# EAGLE board panel-controllers (EAGLE 9.6.2)
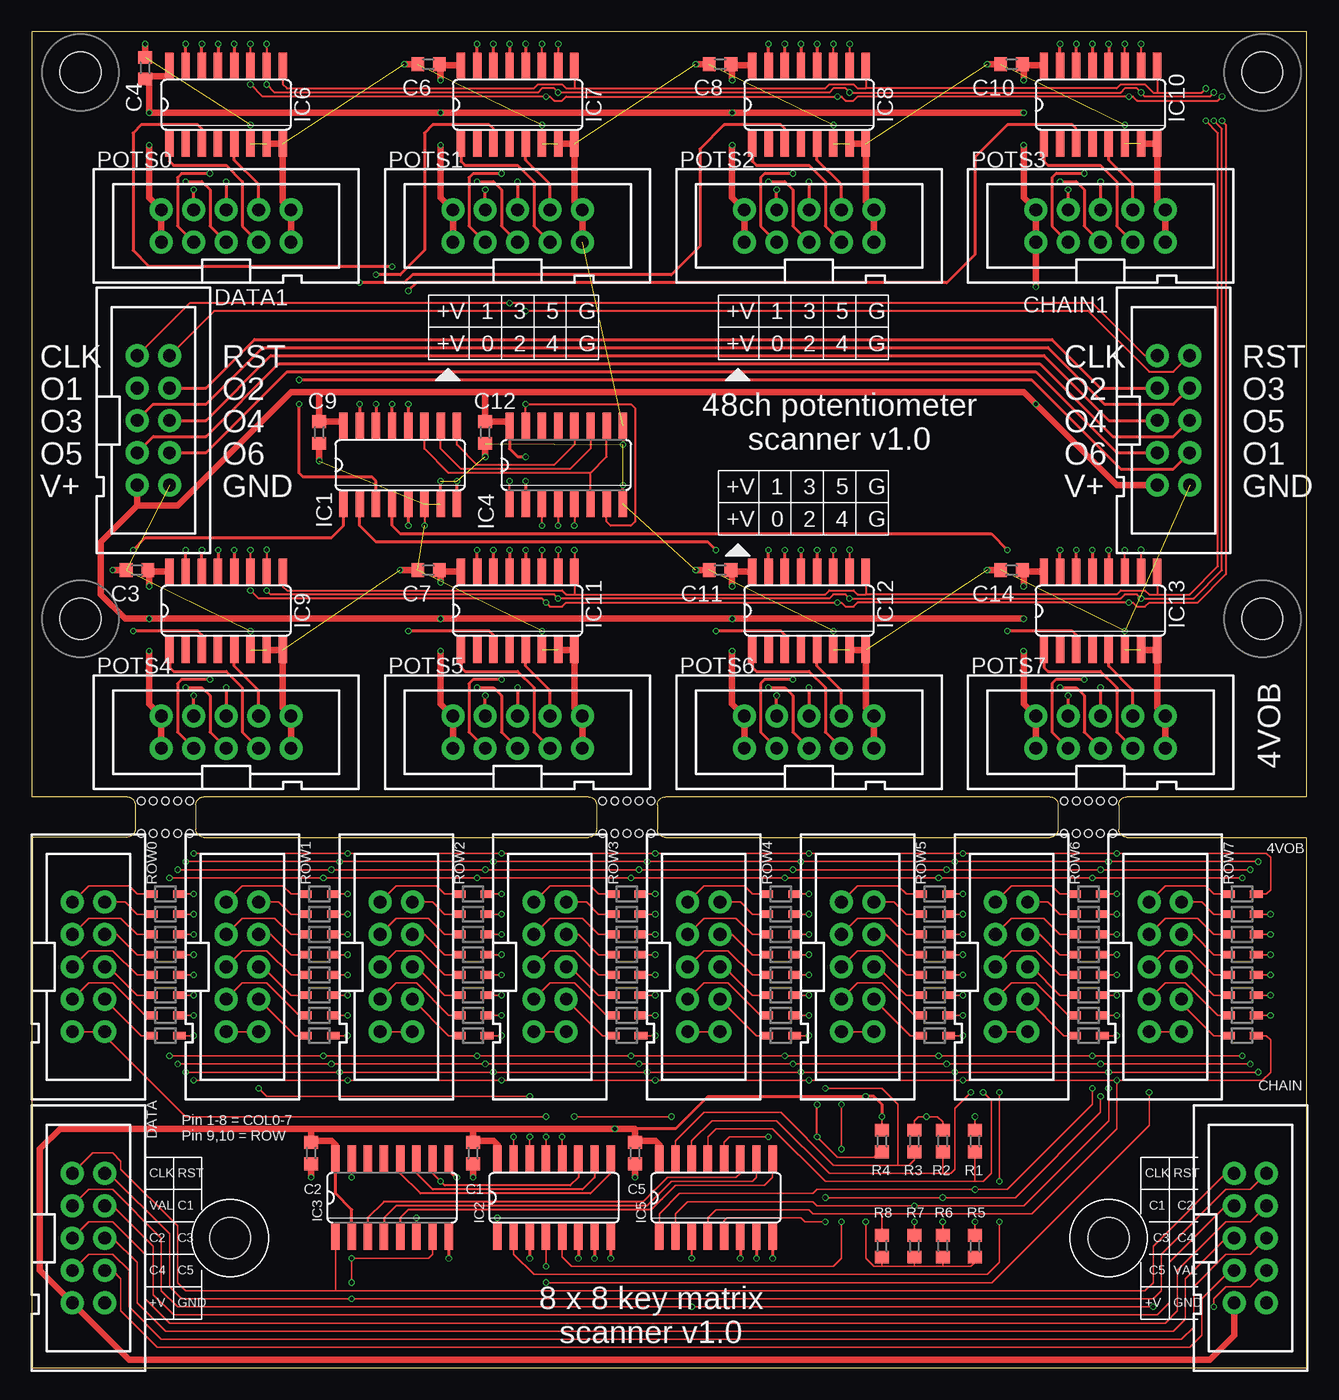
[diagram p0: board, top side]
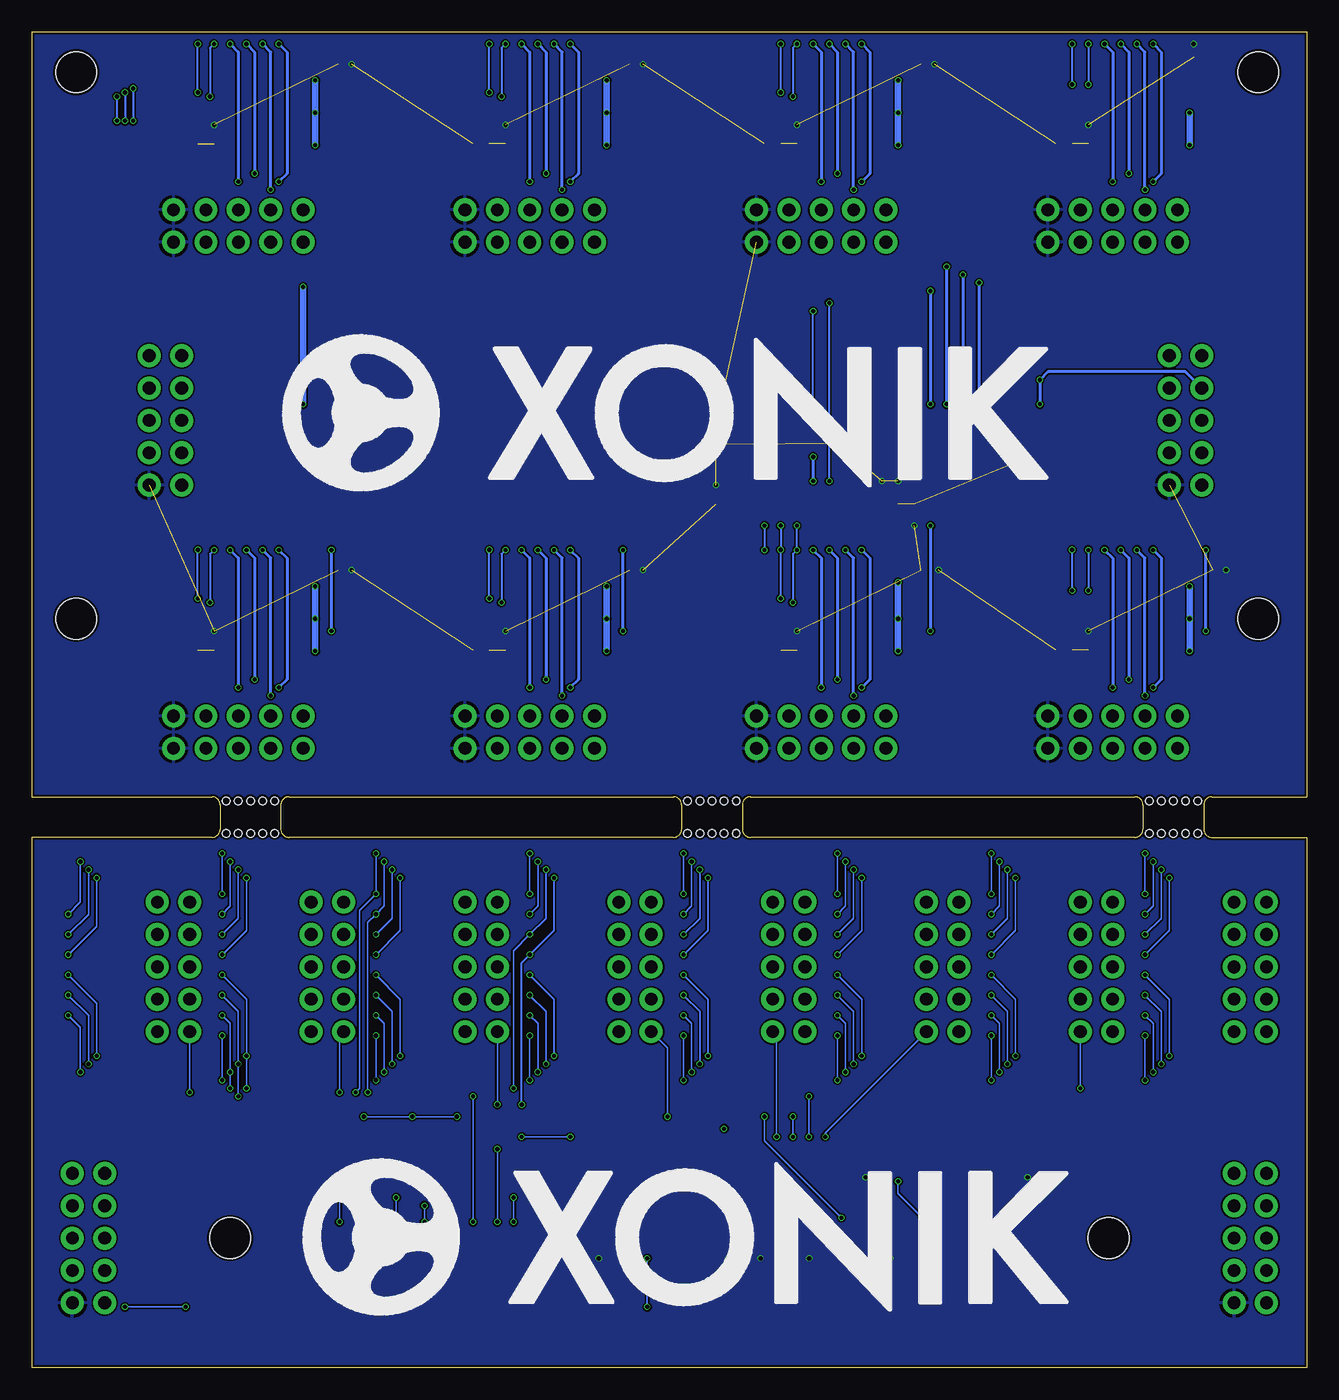
[diagram p1: board, bottom side, seen from below]

Size 100.01 x 104.77 mm. Coordinates in mm from the lower left corner, seen from the top.
Outline: 100,41.59 100,0 0,0 0,41.59
Outline: 100,44.77 100,104.77 0,104.77 0,44.77 7.46,44.77 arc-90 8.1,44.13 8.1,42.23 arc-90 7.46,41.59 0,41.59
Outline: 100.01,44.77 85.88,44.77 arc90 85.25,44.13 85.25,42.23 arc90 85.88,41.59 100.01,41.59
Outline: 13.49,41.59 arc-90 12.86,42.23 12.86,44.13 arc-90 13.49,44.77 43.66,44.77 arc-90 44.29,44.13 44.29,42.23 arc-90 43.66,41.59 13.49,41.59
Outline: 80.49,42.23 arc-90 79.85,41.59 49.69,41.59 arc-90 49.05,42.23 49.05,44.13 arc-90 49.69,44.77 79.85,44.77 arc-90 80.49,44.13 80.49,42.23
Copper layers (1*16): Top 0.035mm / dielectric 1.6mm / Bottom 0.035mm
Design rules "jlcpcb-2layers": minimum track width 5mil, minimum drill 0.3mm, track to track 5mil, track to pad 5mil, pad to pad 5mil, via to via 5mil, smd to smd 5mil, copper to edge 0.2mm, drill to drill 6mil, minimum pad ring 10mil, minimum via ring 3mil, stop-mask expansion 4mil, vias tented up to drill 0mil, thermal gap 10mil
Holes 3.2 mm at 15.56,10.16 84.45,10.16 3.81,58.74 3.81,101.6 96.52,101.6 96.52,58.74
Holes 0.6 mm at 12.38,41.91 11.43,41.91 10.48,41.91 9.53,41.91 8.57,41.91 8.57,44.45 9.53,44.45 10.48,44.45 11.43,44.45 12.38,44.45 84.77,41.91 83.82,41.91 82.87,41.91 81.92,41.91 80.96,41.91 80.96,44.45 81.92,44.45 82.87,44.45 83.82,44.45 84.77,44.45 48.58,41.91 47.62,41.91 46.67,41.91 45.72,41.91 44.77,41.91 44.77,44.45 45.72,44.45 46.67,44.45 47.62,44.45 48.58,44.45

## Footprints (pad centres in the part's own frame; a part is rotated, then mirrored left to right if it is on the bottom)
C0603-J = smd 1 x 1.1: 1 -0.85,0; 2 0.85,0
CONN-IDC10P-S = drill 1 pad 1.422: 1 -5.08,-1.27; 2 -5.08,1.27; 3 -2.54,-1.27; 4 -2.54,1.27; 5 0,-1.27; 6 0,1.27; 7 2.54,-1.27; 8 2.54,1.27; 9 5.08,-1.27; 10 5.08,1.27
SOD323J = smd 1 x 0.6: 1 -1.1,0; 2 1.1,0
SO16 = smd 0.66 x 2.032: 1 -4.445,-3.073; 2 -3.175,-3.073; 3 -1.905,-3.073; 4 -0.635,-3.073; 5 0.635,-3.073; 6 1.905,-3.073; 7 3.175,-3.073; 8 4.445,-3.073; 9 4.445,3.073; 10 3.175,3.073; 11 1.905,3.073; 12 0.635,3.073; 13 -0.635,3.073; 14 -1.905,3.073; 15 -3.175,3.073; 16 -4.445,3.073
R0603 = smd 1 x 1.1: 1 -0.85,0; 2 0.85,0

## Placement (x,y rotation side)
C1  1uF  [C0603-J]  34.61,16.83 270 top
C2  1uF  [C0603-J]  21.91,16.83 270 top
C3  1uF  [C0603-J]  8.26,62.55 180 top
C4  1uF  [C0603-J]  8.89,101.92 90 top
C5  1uF  [C0603-J]  47.31,16.83 270 top
C6  1uF  [C0603-J]  31.11,102.23 180 top
C7  1uF  [C0603-J]  31.11,62.55 180 top
C8  1uF  [C0603-J]  53.98,102.23 180 top
C9  1uF  [C0603-J]  22.54,73.34 270 top
C10  1uF  [C0603-J]  76.83,102.23 180 top
C11  1uF  [C0603-J]  53.98,62.55 180 top
C12  1uF  [C0603-J]  35.56,73.34 270 top
C14  1uF  [C0603-J]  76.83,62.55 180 top
CHAIN  CONN-IDC-10PS  [CONN-IDC10P-S]  95.57,10.16 270 top
CHAIN1  CONN-IDC-10PS  [CONN-IDC10P-S]  89.53,74.3 270 top
D9  1N4148SOD323  [SOD323J]  10.48,37.15 0 top
D10  1N4148SOD323  [SOD323J]  10.48,35.56 0 top
D11  1N4148SOD323  [SOD323J]  10.48,33.97 0 top
D12  1N4148SOD323  [SOD323J]  10.48,32.38 0 top
D13  1N4148SOD323  [SOD323J]  10.48,30.8 0 top
D14  1N4148SOD323  [SOD323J]  10.48,29.21 0 top
D15  1N4148SOD323  [SOD323J]  10.48,27.62 0 top
D16  1N4148SOD323  [SOD323J]  10.48,26.04 0 top
D17  1N4148SOD323  [SOD323J]  34.61,37.15 0 top
D18  1N4148SOD323  [SOD323J]  34.61,35.56 0 top
D19  1N4148SOD323  [SOD323J]  34.61,33.97 0 top
D20  1N4148SOD323  [SOD323J]  34.61,32.38 0 top
D21  1N4148SOD323  [SOD323J]  34.61,30.8 0 top
D22  1N4148SOD323  [SOD323J]  34.61,29.21 0 top
D23  1N4148SOD323  [SOD323J]  34.61,27.62 0 top
D24  1N4148SOD323  [SOD323J]  34.61,26.04 0 top
D25  1N4148SOD323  [SOD323J]  22.54,37.15 0 top
D26  1N4148SOD323  [SOD323J]  22.54,35.56 0 top
D27  1N4148SOD323  [SOD323J]  22.54,33.97 0 top
D28  1N4148SOD323  [SOD323J]  22.54,32.38 0 top
D29  1N4148SOD323  [SOD323J]  22.54,30.8 0 top
D30  1N4148SOD323  [SOD323J]  22.54,29.21 0 top
D31  1N4148SOD323  [SOD323J]  22.54,27.62 0 top
D32  1N4148SOD323  [SOD323J]  22.54,26.04 0 top
D33  1N4148SOD323  [SOD323J]  58.74,37.15 0 top
D34  1N4148SOD323  [SOD323J]  58.74,35.56 0 top
D35  1N4148SOD323  [SOD323J]  58.74,33.97 0 top
D36  1N4148SOD323  [SOD323J]  58.74,32.38 0 top
D37  1N4148SOD323  [SOD323J]  58.74,30.8 0 top
D38  1N4148SOD323  [SOD323J]  58.74,29.21 0 top
D39  1N4148SOD323  [SOD323J]  58.74,27.62 0 top
D40  1N4148SOD323  [SOD323J]  58.74,26.04 0 top
D41  1N4148SOD323  [SOD323J]  46.67,37.15 0 top
D42  1N4148SOD323  [SOD323J]  46.67,35.56 0 top
D43  1N4148SOD323  [SOD323J]  46.67,33.97 0 top
D44  1N4148SOD323  [SOD323J]  46.67,32.38 0 top
D45  1N4148SOD323  [SOD323J]  46.67,30.8 0 top
D46  1N4148SOD323  [SOD323J]  46.67,29.21 0 top
D47  1N4148SOD323  [SOD323J]  46.67,27.62 0 top
D48  1N4148SOD323  [SOD323J]  46.67,26.04 0 top
D57  1N4148SOD323  [SOD323J]  70.8,37.15 0 top
D58  1N4148SOD323  [SOD323J]  70.8,35.56 0 top
D59  1N4148SOD323  [SOD323J]  70.8,33.97 0 top
D60  1N4148SOD323  [SOD323J]  70.8,32.38 0 top
D61  1N4148SOD323  [SOD323J]  70.8,30.8 0 top
D62  1N4148SOD323  [SOD323J]  70.8,29.21 0 top
D63  1N4148SOD323  [SOD323J]  70.8,27.62 0 top
D64  1N4148SOD323  [SOD323J]  70.8,26.04 0 top
D73  1N4148SOD323  [SOD323J]  82.87,37.15 0 top
D74  1N4148SOD323  [SOD323J]  82.87,35.56 0 top
D75  1N4148SOD323  [SOD323J]  82.87,33.97 0 top
D76  1N4148SOD323  [SOD323J]  82.87,32.38 0 top
D77  1N4148SOD323  [SOD323J]  82.87,30.8 0 top
D78  1N4148SOD323  [SOD323J]  82.87,29.21 0 top
D79  1N4148SOD323  [SOD323J]  82.87,27.62 0 top
D80  1N4148SOD323  [SOD323J]  82.87,26.04 0 top
D89  1N4148SOD323  [SOD323J]  94.93,37.15 0 top
D90  1N4148SOD323  [SOD323J]  94.93,35.56 0 top
D91  1N4148SOD323  [SOD323J]  94.93,33.97 0 top
D92  1N4148SOD323  [SOD323J]  94.93,32.38 0 top
D93  1N4148SOD323  [SOD323J]  94.93,30.8 0 top
D94  1N4148SOD323  [SOD323J]  94.93,29.21 0 top
D95  1N4148SOD323  [SOD323J]  94.93,27.62 0 top
D96  1N4148SOD323  [SOD323J]  94.93,26.04 0 top
DATA  CONN-IDC-10PS  [CONN-IDC10P-S]  4.45,10.16 270 top
DATA1  CONN-IDC-10PS  [CONN-IDC10P-S]  9.53,74.3 270 top
IC1  4051D  [SO16]  28.89,70.8 0 top
IC2  4051D  [SO16]  40.96,13.34 0 top
IC3  4520D  [SO16]  28.26,13.34 0 top
IC4  4520D  [SO16]  41.91,70.8 0 top
IC5  4051D  [SO16]  53.66,13.34 0 top
IC6  4051D  [SO16]  15.24,99.06 0 top
IC7  4051D  [SO16]  38.1,99.06 0 top
IC8  4051D  [SO16]  60.96,99.06 0 top
IC9  4051D  [SO16]  15.24,59.37 0 top
IC10  4051D  [SO16]  83.82,99.06 0 top
IC11  4051D  [SO16]  38.1,59.37 0 top
IC12  4051D  [SO16]  60.96,59.37 0 top
IC13  4051D  [SO16]  83.82,59.37 0 top
POTS0  CONN-IDC-10PS  [CONN-IDC10P-S]  15.24,89.53 0 top
POTS1  CONN-IDC-10PS  [CONN-IDC10P-S]  38.1,89.53 0 top
POTS2  CONN-IDC-10PS  [CONN-IDC10P-S]  60.96,89.53 0 top
POTS3  CONN-IDC-10PS  [CONN-IDC10P-S]  83.82,89.53 0 top
POTS4  CONN-IDC-10PS  [CONN-IDC10P-S]  15.24,49.85 0 top
POTS5  CONN-IDC-10PS  [CONN-IDC10P-S]  38.1,49.85 0 top
POTS6  CONN-IDC-10PS  [CONN-IDC10P-S]  60.96,49.85 0 top
POTS7  CONN-IDC-10PS  [CONN-IDC10P-S]  83.82,49.85 0 top
R1  10k  [R0603]  73.98,17.78 90 top
R2  10k  [R0603]  71.44,17.78 90 top
R3  10k  [R0603]  69.22,17.78 90 top
R4  10k  [R0603]  66.67,17.78 90 top
R5  10k  [R0603]  73.98,9.53 270 top
R6  10k  [R0603]  71.44,9.53 270 top
R7  10k  [R0603]  69.22,9.53 270 top
R8  10k  [R0603]  66.67,9.53 270 top
ROW0  CONN-IDC-10PS  [CONN-IDC10P-S]  4.45,31.43 270 top
ROW1  CONN-IDC-10PS  [CONN-IDC10P-S]  16.51,31.43 270 top
ROW2  CONN-IDC-10PS  [CONN-IDC10P-S]  28.57,31.43 270 top
ROW3  CONN-IDC-10PS  [CONN-IDC10P-S]  40.64,31.43 270 top
ROW4  CONN-IDC-10PS  [CONN-IDC10P-S]  52.7,31.43 270 top
ROW5  CONN-IDC-10PS  [CONN-IDC10P-S]  64.77,31.43 270 top
ROW6  CONN-IDC-10PS  [CONN-IDC10P-S]  76.83,31.43 270 top
ROW7  CONN-IDC-10PS  [CONN-IDC10P-S]  88.9,31.43 270 top
U$1  [XONIK_LOGO_60]  78.74,4.13 0 bottom
U$2  [XONIK_LOGO_60]  80.33,68.77 0 bottom

## Library data of the parts
C1-C12 C14 CHAIN CHAIN1 D9-D48 D57-D64 D73-D80 D89-D96 DATA DATA1 POTS0 POTS1-POTS7 ROW0 ROW1-ROW7 U$1 U$2 = joakim
IC1 IC2 IC5-IC13 = 40xx
IC3 IC4 = 45xx
R1-R8 = rcl; SPICEPREFIX: R

## Nets
+5V: C1.1 C2.1 C5.1 CHAIN.9 DATA.9 IC2.16 IC3.2 IC3.16 IC5.16 R1.2 R2.2 R3.2 R4.2 R5.2 R6.2 R7.2 R8.2
+5V1: C3.1 C4.1 C6.1 C7.1 C8.1 C9.1 C10.1 C11.1 C12.1 C14.1 CHAIN1.9 DATA1.9 IC1.16 IC4.2 IC4.16 IC6.16 IC7.16 IC8.16 IC9.16 IC10.16 IC11.16 IC12.16 IC13.16 POTS0.1 POTS0.2 POTS1.1 POTS1.2 POTS2.1 POTS2.2 POTS3.1 POTS3.2 POTS4.1 POTS4.2 POTS5.1 POTS5.2 POTS6.1 POTS6.2 POTS7.1 POTS7.2
BUTTON_VAL_CHAIN_1: CHAIN.3 DATA.4
BUTTON_VAL_CHAIN_2: CHAIN.4 DATA.5
BUTTON_VAL_CHAIN_3: CHAIN.5 DATA.6
BUTTON_VAL_CHAIN_4: CHAIN.6 DATA.7
BUTTON_VAL_CHAIN_5: CHAIN.7 DATA.8
BUTTON_VALUE: CHAIN.8 DATA.3 IC5.3
CLK: CHAIN.1 DATA.1 IC3.1
CLK1: CHAIN1.1 DATA1.1 IC4.1
COL0: D9.2 D17.2 D25.2 D33.2 D41.2 D57.2 D73.2 D89.2 IC5.13 R1.1
COL1: D10.2 D18.2 D26.2 D34.2 D42.2 D58.2 D74.2 D90.2 IC5.14 R2.1
COL2: D11.2 D19.2 D27.2 D35.2 D43.2 D59.2 D75.2 D91.2 IC5.15 R3.1
COL3: D12.2 D20.2 D28.2 D36.2 D44.2 D60.2 D76.2 D92.2 IC5.12 R4.1
COL4: D13.2 D21.2 D29.2 D37.2 D45.2 D61.2 D77.2 D93.2 IC5.1 R5.1
COL5: D14.2 D22.2 D30.2 D38.2 D46.2 D62.2 D78.2 D94.2 IC5.5 R6.1
COL6: D15.2 D23.2 D31.2 D39.2 D47.2 D63.2 D79.2 D95.2 IC5.2 R7.1
COL7: D16.2 D24.2 D32.2 D40.2 D48.2 D64.2 D80.2 D96.2 IC5.4 R8.1
COL_A: IC3.3 IC5.11
COL_B: IC3.4 IC5.10
COL_C: IC3.5 IC5.9
GND: C1.2 C2.2 C5.2 CHAIN.10 DATA.10 IC2.3 IC2.6 IC2.7 IC2.8 IC3.8 IC3.9 IC5.6 IC5.7 IC5.8
GND1: C3.2 C4.2 C6.2 C7.2 C8.2 C9.2 C10.2 C11.2 C12.2 C14.2 CHAIN1.10 DATA1.10 IC1.6 IC1.7 IC1.8 IC4.8 IC4.9 IC6.6 IC6.7 IC6.8 IC7.6 IC7.7 IC7.8 IC8.6 IC8.7 IC8.8 IC9.6 IC9.7 IC9.8 IC10.6 IC10.7 IC10.8 IC11.6 IC11.7 IC11.8 IC12.6 IC12.7 IC12.8 IC13.6 IC13.7 IC13.8 POTS0.9 POTS0.10 POTS1.9 POTS1.10 POTS2.9 POTS2.10 POTS3.9 POTS3.10 POTS4.9 POTS4.10 POTS5.9 POTS5.10 POTS6.9 POTS6.10 POTS7.9 POTS7.10
N$9: D9.1 ROW0.1
N$10: D10.1 ROW0.2
N$11: D11.1 ROW0.3
N$12: D12.1 ROW0.4
N$13: D13.1 ROW0.5
N$14: D14.1 ROW0.6
N$15: D15.1 ROW0.7
N$16: D16.1 ROW0.8
N$17: D17.1 ROW2.1
N$18: D18.1 ROW2.2
N$19: D19.1 ROW2.3
N$20: D20.1 ROW2.4
N$21: D21.1 ROW2.5
N$22: D22.1 ROW2.6
N$23: D23.1 ROW2.7
N$24: D24.1 ROW2.8
N$25: D25.1 ROW1.1
N$26: D26.1 ROW1.2
N$27: D27.1 ROW1.3
N$28: D28.1 ROW1.4
N$29: D29.1 ROW1.5
N$30: D30.1 ROW1.6
N$31: D31.1 ROW1.7
N$32: D32.1 ROW1.8
N$33: D33.1 ROW4.1
N$34: D34.1 ROW4.2
N$35: D35.1 ROW4.3
N$36: D36.1 ROW4.4
N$37: D37.1 ROW4.5
N$38: D38.1 ROW4.6
N$39: D39.1 ROW4.7
N$40: D40.1 ROW4.8
N$41: D41.1 ROW3.1
N$42: D42.1 ROW3.2
N$43: D43.1 ROW3.3
N$44: D44.1 ROW3.4
N$45: D45.1 ROW3.5
N$46: D46.1 ROW3.6
N$47: D47.1 ROW3.7
N$48: D48.1 ROW3.8
N$57: D57.1 ROW5.1
N$58: D58.1 ROW5.2
N$59: D59.1 ROW5.3
N$60: D60.1 ROW5.4
N$61: D61.1 ROW5.5
N$62: D62.1 ROW5.6
N$63: D63.1 ROW5.7
N$64: D64.1 ROW5.8
N$73: D73.1 ROW6.1
N$74: D74.1 ROW6.2
N$75: D75.1 ROW6.3
N$76: D76.1 ROW6.4
N$77: D77.1 ROW6.5
N$78: D78.1 ROW6.6
N$79: D79.1 ROW6.7
N$80: D80.1 ROW6.8
N$89: D89.1 ROW7.1
N$90: D90.1 ROW7.2
N$91: D91.1 ROW7.3
N$92: D92.1 ROW7.4
N$93: D93.1 ROW7.5
N$94: D94.1 ROW7.6
N$95: D95.1 ROW7.7
N$96: D96.1 ROW7.8
POT0: IC6.13 POTS0.3
POT1: IC6.14 POTS0.4
POT2: IC6.15 POTS0.5
POT3: IC6.12 POTS0.6
POT4: IC6.1 POTS0.7
POT5: IC6.5 POTS0.8
POT6: IC7.13 POTS1.3
POT7: IC7.14 POTS1.4
POT8: IC7.15 POTS1.5
POT9: IC7.12 POTS1.6
POT10: IC7.1 POTS1.7
POT11: IC7.5 POTS1.8
POT12: IC8.13 POTS2.3
POT13: IC8.14 POTS2.4
POT14: IC8.15 POTS2.5
POT15: IC8.12 POTS2.6
POT16: IC8.1 POTS2.7
POT17: IC8.5 POTS2.8
POT18: IC10.13 POTS3.3
POT19: IC10.14 POTS3.4
POT20: IC10.15 POTS3.5
POT21: IC10.12 POTS3.6
POT22: IC10.1 POTS3.7
POT23: IC10.5 POTS3.8
POT24: IC9.13 POTS4.3
POT25: IC9.14 POTS4.4
POT26: IC9.15 POTS4.5
POT27: IC9.12 POTS4.6
POT28: IC9.1 POTS4.7
POT29: IC9.5 POTS4.8
POT30: IC11.13 POTS5.3
POT31: IC11.14 POTS5.4
POT32: IC11.15 POTS5.5
POT33: IC11.12 POTS5.6
POT34: IC11.1 POTS5.7
POT35: IC11.5 POTS5.8
POT36: IC12.13 POTS6.3
POT37: IC12.14 POTS6.4
POT38: IC12.15 POTS6.5
POT39: IC12.12 POTS6.6
POT40: IC12.1 POTS6.7
POT41: IC12.5 POTS6.8
POT42: IC13.13 POTS7.3
POT43: IC13.14 POTS7.4
POT44: IC13.15 POTS7.5
POT45: IC13.12 POTS7.6
POT46: IC13.1 POTS7.7
POT47: IC13.5 POTS7.8
POT_A: IC4.3 IC6.11 IC7.11 IC8.11 IC9.11 IC10.11 IC11.11 IC12.11 IC13.11
POT_B: IC4.4 IC6.10 IC7.10 IC8.10 IC9.10 IC10.10 IC11.10 IC12.10 IC13.10
POT_C: IC4.5 IC6.9 IC7.9 IC8.9 IC9.9 IC10.9 IC11.9 IC12.9 IC13.9
POT_VAL_CHAIN_1: CHAIN1.3 DATA1.4
POT_VAL_CHAIN_2: CHAIN1.4 DATA1.5
POT_VAL_CHAIN_3: CHAIN1.5 DATA1.6
POT_VAL_CHAIN_4: CHAIN1.6 DATA1.7
POT_VAL_CHAIN_5: CHAIN1.7 DATA1.8
POT_VALUE: CHAIN1.8 DATA1.3 IC1.3
RESET: CHAIN.2 DATA.2 IC3.7 IC3.15
RESET1: CHAIN1.2 DATA1.2 IC4.7 IC4.15
ROW0: IC2.13 ROW0.9 ROW0.10
ROW1: IC2.14 ROW1.9 ROW1.10
ROW2: IC2.15 ROW2.9 ROW2.10
ROW3: IC2.12 ROW3.9 ROW3.10
ROW4: IC2.1 ROW4.9 ROW4.10
ROW5: IC2.5 ROW5.9 ROW5.10
ROW6: IC2.2 ROW6.9 ROW6.10
ROW7: IC2.4 ROW7.9 ROW7.10
ROW8: IC1.13 IC6.3
ROW9: IC1.14 IC7.3
ROW10: IC1.15 IC8.3
ROW11: IC1.12 IC10.3
ROW12: IC1.1 IC9.3
ROW13: IC1.5 IC11.3
ROW14: IC1.2 IC12.3
ROW15: IC1.4 IC13.3
ROW_A: IC2.11 IC3.6 IC3.10
ROW_A1: IC1.11 IC4.6 IC4.10
ROW_B: IC2.10 IC3.11
ROW_B1: IC1.10 IC4.11
ROW_C: IC2.9 IC3.12
ROW_C1: IC1.9 IC4.12

## Tracks (layer width: path | path; a pad name or v marks a point on that pad's centre or on a via)
+5V  (via drill 0.33)
  Top 0.127: R1.2 v73.98,19.68 | v65.41,11.43 65.41,8.57 66.04,7.94 66.67,7.94 | R2.2 71.44,19.27 71.02,19.68 v70.17,19.68 69.53,19.68 69.22,19.37 R3.2 | R5.2 73.98,8.26 73.66,7.94 71.44,7.94 | 71.44,7.94 69.22,7.94 | 69.22,7.94 66.67,7.94 | R8.2 66.67,7.94 | R7.2 69.22,7.94 | R6.2 71.44,7.94 | v66.67,19.68 R4.2
  Top 0.254: IC3.2 25.08,12.38 23.81,13.65 IC3.16 | v66.67,19.68 66.67,20.64 66.04,21.27 v65.41,21.27 53.02,21.27 50.48,18.73 47.31,18.73
  Top 0.508: 21.91,18.73 C2.1 22.01,17.78 23.5,17.78 23.81,17.46 IC3.16 | 21.91,18.73 34.61,18.73 | 47.31,17.78 47.31,18.73 v45.72,18.73 34.61,18.73 | 47.31,17.78 C5.1 | C1.1 34.61,17.78 | 34.61,17.78 34.61,18.73 | IC2.16 36.51,17.46 36.2,17.78 34.61,17.78 | IC5.16 49.21,17.46 48.9,17.78 47.31,17.78 | 21.91,18.73 2.22,18.73 0.64,17.14 0.64,7.62 DATA.9 7.62,0.64 92.39,0.64 94.3,2.54 CHAIN.9
  Bottom 0.127: v65.41,21.27 v65.41,11.43 | v73.98,19.68 v70.17,19.68 v66.67,19.68
+5V1  (via drill 0.33)
  Top 0.254: IC4.16 37.47,72.07 38.1,71.44 v38.73,71.44 | v38.73,69.53 IC4.2
  Top 0.508: POTS0.1 POTS0.2 9.21,91.76 v9.21,95.89 | IC7.16 32.07,102.13 C6.1 | POTS1.1 POTS1.2 32.07,91.76 v32.07,95.89 | C6.1 32.07,102.13 v32.07,100.97 | C6.1 32.07,102.34 | IC8.16 54.93,102.13 C8.1 | POTS2.1 POTS2.2 54.93,91.76 v54.93,95.89 | C8.1 54.93,102.13 v54.93,100.97 | C8.1 54.93,102.34 | IC10.16 77.79,102.13 C10.1 | C10.1 77.79,102.13 v77.79,100.97 | v77.79,95.89 77.79,91.76 POTS3.2 POTS3.1 v78.74,84.77 | C10.1 77.79,102.34 | IC9.16 9.21,62.45 C3.1 | POTS4.1 POTS4.2 9.21,52.07 v9.21,56.2 | C3.1 9.21,62.45 v9.21,61.28 | C3.1 9.21,62.65 | IC11.16 32.07,62.45 C7.1 | POTS5.1 POTS5.2 32.07,52.07 v32.07,56.2 | C7.1 32.07,62.45 v32.07,61.59 | C7.1 32.07,62.65 | IC12.16 54.93,62.45 C11.1 | POTS6.1 POTS6.2 54.93,52.07 v54.93,56.2 | C11.1 54.93,62.45 v54.93,61.28 | C11.1 54.93,62.65 | v77.79,58.74 v54.93,58.74 v32.07,58.74 v9.21,58.74 7.3,58.74 5.4,60.64 5.4,64.77 8.26,67.63 | IC13.16 77.79,62.45 C14.1 | POTS7.1 POTS7.2 77.79,52.07 v77.79,56.2 | C14.1 77.79,62.45 v77.79,61.28 | C14.1 77.79,62.65 | v77.79,98.42 v54.93,98.42 v32.07,98.42 v9.21,98.42 9.21,101.18 C4.1 9.11,101.28 10.79,101.28 IC6.16 | CHAIN1.9 85.09,69.22 v78.74,75.56 77.79,76.52 35.56,76.52 | DATA1.9 8.26,67.63 | 8.26,67.63 11.43,67.63 20.32,76.52 22.54,76.52 | 22.54,76.52 35.56,76.52 | 22.54,76.52 C9.1 24.13,74.19 IC1.16 | 35.56,76.52 C12.1 37.15,74.19 IC4.16
  Bottom 0.254: v38.73,71.44 v38.73,69.53
  Bottom 0.508: v9.21,98.42 v9.21,95.89 | v32.07,100.97 v32.07,98.42 v32.07,95.89 | v54.93,100.97 v54.93,98.42 v54.93,95.89 | v77.79,100.97 v77.79,98.42 v77.79,95.89 | v9.21,61.28 v9.21,58.74 v9.21,56.2 | v32.07,61.59 v32.07,58.74 v32.07,56.2 | v54.93,61.28 v54.93,58.74 v54.93,56.2 | v77.79,61.28 v77.79,58.74 v77.79,56.2 | v78.74,84.77 v78.74,75.56
BUTTON_VAL_CHAIN_1
  Top 0.127: CHAIN.3 93.66,12.7 89.53,8.57 89.22,8.26 89.22,5.08 88.27,4.13 85.09,4.13 11.11,4.13 9.53,5.71 9.53,9.53 6.35,12.7 DATA.4
BUTTON_VAL_CHAIN_2
  Top 0.127: DATA.5 4.45,11.43 6.35,11.43 8.89,8.89 8.89,5.4 10.79,3.49 85.72,3.49 88.9,3.49 89.85,4.45 89.85,7.62 93.66,11.43 95.57,11.43 CHAIN.4
BUTTON_VAL_CHAIN_3
  Top 0.127: CHAIN.5 93.66,10.16 90.49,6.99 90.49,3.81 89.53,2.86 86.36,2.86 10.48,2.86 8.26,5.08 8.26,8.26 6.35,10.16 DATA.6
BUTTON_VAL_CHAIN_4
  Top 0.127: CHAIN.6 95.57,8.89 93.66,8.89 91.12,6.35 91.12,3.17 90.17,2.22 10.16,2.22 7.62,4.76 7.62,7.62 6.35,8.89 4.45,8.89 DATA.7
BUTTON_VAL_CHAIN_5
  Top 0.127: CHAIN.7 93.98,7.62 92.08,5.71 91.76,5.4 91.76,2.54 90.81,1.59 87.95,1.59 9.84,1.59 6.99,4.45 6.99,6.99 6.35,7.62 DATA.8
BUTTON_VALUE  (via drill 0.33)
  Top 0.127: CHAIN.8 95.57,6.35 93.66,6.35 92.71,5.4 v92.71,4.76 | DATA.3 4.45,13.97 6.35,13.97 10.16,10.16 10.16,6.03 11.43,4.76 v51.75,4.76 v87.95,4.76
  Top 0.152: IC5.3 v51.75,8.57
  Bottom 0.127: v51.75,8.57 v51.75,4.76 | v87.95,4.76 v92.71,4.76
CLK
  Top 0.127: CHAIN.1 93.66,15.24 87.95,9.53 87.95,6.67 87.31,6.03 23.81,6.03 | DATA.1 4.76,16.83 6.35,16.83 6.99,16.19 6.99,15.56 11.43,11.11 11.43,6.67 12.06,6.03 23.81,6.03 | IC3.1 23.81,6.03
CLK1  (via drill 0.33)
  Top 0.152: DATA1.1 12.38,83.5 v37.47,83.5 83.19,83.5 87.31,79.38 CHAIN1.1 | IC4.1 v37.47,69.53
  Bottom 0.152: v37.47,69.53 v37.47,83.5
COL0  (via drill 0.33)
  Top 0.127: 11.75,37.32 D9.2 v12.7,37.15 | 35.88,37.32 D17.2 v36.83,37.15 | 47.94,37.32 D41.2 v48.9,37.15 | 60.16,37.15 D33.2 v60.96,37.15 | 72.07,37.15 D57.2 v73.03,37.15 | 84.14,37.32 D73.2 v85.09,37.15 | IC5.13 53.02,18.1 53.66,18.73 58.1,18.73 62.23,14.61 73.98,14.61 | 73.98,14.61 74.61,14.61 75.25,15.24 75.25,20.95 v74.61,21.59 | D25.2 v24.77,37.15 | D89.2 96.84,37.15 97.16,37.47 97.16,40.01 96.84,40.32 v85.09,40.32 v73.03,40.32 v60.96,40.32 v48.9,40.32 v36.83,40.32 v24.77,40.32 v12.7,40.32 | R1.1 73.98,14.61
  Bottom 0.127: v24.77,37.15 v24.77,40.32 | v36.83,37.15 v36.83,40.32 | v48.9,37.15 v48.9,40.32 | v60.96,37.15 v60.96,40.32 | v73.03,40.32 v73.03,37.15 74.3,35.88 74.3,21.91 v74.61,21.59 | v85.09,37.15 v85.09,40.32 | v12.7,37.15 v12.7,40.32
COL1  (via drill 0.33)
  Top 0.127: D90.2 v97.16,35.56 | IC5.14 51.75,17.78 53.34,19.37 58.42,19.37 62.55,15.24 71.44,15.24 | 71.44,15.24 72.07,15.24 72.39,15.56 72.39,20.32 v73.66,21.59 | D26.2 v24.77,35.56 | D18.2 v36.83,35.56 | D42.2 v48.9,35.56 | D34.2 v60.96,35.56 | D58.2 v73.03,35.56 | D74.2 v85.09,35.56 | v12.06,39.69 v24.13,39.69 v36.2,39.69 v48.26,39.69 v60.33,39.69 v72.39,39.69 v84.45,39.69 v96.2,39.69 | D10.2 v12.7,35.56 | R2.1 71.44,15.24
  Bottom 0.127: v24.77,35.56 24.13,36.2 v24.13,39.69 | v36.83,35.56 36.2,36.2 v36.2,39.69 | v48.9,35.56 48.26,36.2 v48.26,39.69 | v60.96,35.56 60.33,36.2 v60.33,39.69 | v72.39,39.69 72.39,36.2 v73.03,35.56 73.66,34.92 v73.66,21.59 | v85.09,35.56 84.45,36.2 v84.45,39.69 | v96.2,39.69 96.2,36.51 v97.16,35.56 | v12.7,35.56 12.06,36.2 v12.06,39.69
COL2  (via drill 0.33)
  Top 0.127: D59.2 71.75,33.97 71.67,34.06 71.73,34.12 | D91.2 v97.16,33.97 | IC5.15 50.48,17.78 52.7,20 58.74,20 62.87,15.88 67.94,15.88 | 72.07,33.97 D59.2 | D27.2 v24.77,33.97 | D19.2 v36.83,33.97 | D43.2 v48.9,33.97 | D35.2 v60.96,33.97 | D59.2 v73.03,33.97 | D75.2 v85.09,33.97 | v95.57,39.05 v83.82,39.05 v71.75,39.05 v59.69,39.05 v47.62,39.05 v35.56,39.05 v23.5,39.05 v11.43,39.05 | D11.2 v12.7,33.97 | v62.23,21.91 66.67,21.91 67.94,20.64 67.94,15.88 | 67.94,15.88 68.8,15.88 69.22,16.3 R3.1
  Bottom 0.127: v24.77,33.97 23.5,35.24 v23.5,39.05 | v36.83,33.97 35.56,35.24 v35.56,39.05 | v48.9,33.97 47.62,35.24 v47.62,39.05 | v59.69,39.05 59.69,35.24 v60.96,33.97 62.23,32.7 v62.23,21.91 | v73.03,33.97 71.75,35.24 v71.75,39.05 | v85.09,33.97 83.82,35.24 v83.82,39.05 | v97.16,33.97 95.57,35.56 v95.57,39.05 | v12.7,33.97 11.43,35.24 v11.43,39.05
COL3  (via drill 0.33, 0.35)
  Top 0.127: D92.2 v97.16,32.38 | v57.78,18.1 54.71,18.1 54.29,17.68 IC5.12 | 66.04,16.51 63.18,16.51 v61.59,18.1 | 66.04,16.51 66.99,16.51 | v10.79,38.42 v22.86,38.42 v34.92,38.42 v46.99,38.42 v59.05,38.42 v71.12,38.42 v83.19,38.42 v94.93,38.42 | D28.2 v24.77,32.38 | D20.2 v36.83,32.38 | D44.2 v48.9,32.38 | D36.2 v60.96,32.38 | D60.2 v73.03,32.38 | D76.2 v85.09,32.38 | D12.2 v12.7,32.38 | 66.04,16.51 66.46,16.93 R4.1
  Top 0.152: v61.59,18.1 v61.59,20.64
  Bottom 0.127: v24.77,32.38 22.86,34.29 v22.86,38.42 | v36.83,32.38 34.92,34.29 v34.92,38.42 | v48.9,32.38 46.99,34.29 v46.99,38.42 | v59.05,38.42 59.05,34.29 v60.96,32.38 61.59,31.75 | v73.03,32.38 71.12,34.29 v71.12,38.42 | v85.09,32.38 83.19,34.29 v83.19,38.42 | v97.16,32.38 94.93,34.61 v94.93,38.42 | v12.7,32.38 10.79,34.29 v10.79,38.42 | v61.59,18.1 v57.78,18.1
  Bottom 0.152: v61.59,20.64 61.59,31.75
COL4  (via drill 0.33)
  Top 0.127: D93.2 v97.16,30.8 | v10.79,24.45 v22.86,24.45 v34.92,24.45 v46.99,24.45 v59.05,24.45 v71.12,24.45 v83.19,24.45 v94.93,24.45 | D29.2 v24.77,30.8 | D13.2 v12.7,30.8 | D21.2 v36.83,30.8 | D45.2 v48.9,30.8 | D37.2 v60.96,30.8 | D61.2 v73.03,30.8 | D77.2 v85.09,30.8 | v83.19,21.91 83.19,20.64 76.52,13.97 v73.98,13.97 61.59,13.97 61.28,13.65 50.8,13.65 49.21,12.06 IC5.1 | R5.1 74.07,10.39 73.98,10.48 v73.98,11.43
  Bottom 0.127: v94.93,24.45 94.93,28.57 v97.16,30.8 | v24.77,30.8 22.86,28.89 v22.86,24.45 | v12.7,30.8 10.79,28.89 v10.79,24.45 | v36.83,30.8 34.92,28.89 v34.92,24.45 | v48.9,30.8 46.99,28.89 v46.99,24.45 | v60.96,30.8 59.05,28.89 v59.05,24.45 | v73.03,30.8 71.12,28.89 v71.12,24.45 | v85.09,30.8 83.19,28.89 v83.19,24.45 v83.19,21.91 | v73.98,11.43 v73.98,13.97
COL5  (via drill 0.33)
  Top 0.127: D94.2 v97.16,29.21 | 47.94,29.21 D46.2 v48.9,29.21 | v11.43,23.81 v23.5,23.81 v35.56,23.81 v47.62,23.81 v59.69,23.81 v71.75,23.81 v83.82,23.81 v95.57,23.81 | D30.2 v24.77,29.21 | D14.2 v12.7,29.21 | D22.2 v36.83,29.21 | D38.2 v60.96,29.21 | D62.2 v73.03,29.21 | D78.2 v85.09,29.21 | v83.82,21.27 83.82,20 77.15,13.34 v71.44,13.34 v62.23,13.34 | IC5.5 54.29,11.53 54.51,11.75 60.33,11.75 60.64,11.43 v62.23,11.43 | R6.1 v71.44,11.43
  Bottom 0.127: v95.57,23.81 95.57,27.62 v97.16,29.21 | v24.77,29.21 23.5,27.94 v23.5,23.81 | v12.7,29.21 11.43,27.94 v11.43,23.81 | v36.83,29.21 35.56,27.94 v35.56,23.81 | v48.9,29.21 47.62,27.94 v47.62,23.81 | v60.96,29.21 59.69,27.94 v59.69,23.81 | v73.03,29.21 71.75,27.94 v71.75,23.81 | v85.09,29.21 83.82,27.94 v83.82,23.81 v83.82,21.27 | v62.23,13.34 v62.23,11.43 | v71.44,11.43 v71.44,13.34
COL6  (via drill 0.33)
  Top 0.127: 60.16,27.62 D39.2 v60.96,27.62 | 72.07,27.45 D63.2 v73.03,27.62 | D95.2 v97.16,27.62 | 47.94,27.62 D47.2 v48.9,27.62 | v12.06,23.18 v24.13,23.18 v36.2,23.18 v48.26,23.18 v60.33,23.18 v72.39,23.18 v84.45,23.18 v96.2,23.18 | D31.2 v24.77,27.62 | D15.2 v12.7,27.62 | D23.2 v36.83,27.62 | D79.2 v85.09,27.62 | v84.45,21.91 84.45,19.37 77.79,12.7 v69.22,12.7 61.59,12.7 61.28,13.02 51.44,13.02 50.48,12.06 IC5.2 | R7.1 v69.22,11.43
  Bottom 0.127: v96.2,23.18 96.2,26.67 v97.16,27.62 | v24.77,27.62 24.13,26.99 v24.13,23.18 | v12.7,27.62 12.06,26.99 v12.06,23.18 | v36.83,27.62 36.2,26.99 v36.2,23.18 | v48.9,27.62 48.26,26.99 v48.26,23.18 | v60.96,27.62 60.33,26.99 v60.33,23.18 | v73.03,27.62 72.39,26.99 v72.39,23.18 | v85.09,27.62 84.45,26.99 v84.45,23.18 v84.45,21.91 | v69.22,11.43 v69.22,12.7
COL7  (via drill 0.33)
  Top 0.127: 11.75,25.86 D16.2 v12.7,26.04 | 23.81,25.86 D32.2 v24.77,26.04 | 35.88,25.86 D24.2 v36.83,26.04 | 60.01,25.86 D40.2 v60.96,26.04 | 71.75,25.86 71.9,26.01 D64.2 v73.03,26.04 | 84.14,25.86 D80.2 v85.09,26.04 | D96.2 96.84,26.04 97.16,25.72 97.16,23.18 96.52,22.54 v85.09,22.54 | v12.7,22.54 v24.77,22.54 v36.83,22.54 v48.9,22.54 v60.96,22.54 v73.03,22.54 v85.09,22.54 | D48.2 v48.9,26.04 | IC5.4 53.02,11.75 53.66,12.38 60.96,12.38 61.28,12.06 66.67,12.06 | 66.67,12.06 78.42,12.06 85.09,18.73 v85.09,22.54 | R8.1 66.67,12.06
  Bottom 0.127: v24.77,26.04 v24.77,22.54 | v12.7,26.04 v12.7,22.54 | v36.83,26.04 v36.83,22.54 | v48.9,26.04 v48.9,22.54 | v60.96,26.04 v60.96,22.54 | v73.03,26.04 v73.03,22.54 | v85.09,26.04 v85.09,22.54
COL_A
  Top 0.127: 48.79,13.87 49.85,14.92 55.24,14.92 55.56,15.24 IC5.11
  Top 0.152: 48.79,13.87 47.94,13.02 27.62,13.02 26.35,11.75 IC3.3
COL_B
  Top 0.127: 49.11,13.55 50.16,14.61 56.52,14.61 56.83,14.92 IC5.10
  Top 0.152: 49.11,13.55 48.26,12.7 28.57,12.7 27.62,11.75 IC3.4
COL_C
  Top 0.127: 49.43,13.23 50.48,14.29 57.47,14.29 58.1,14.92 IC5.9
  Top 0.152: 49.43,13.23 48.58,12.38 29.53,12.38 28.89,11.75 IC3.5
GND  (via drill 0.33, 0.35)
  Top 0.254: IC2.3 v39.05,8.57 | IC2.6 v42.86,8.57 | IC2.7 v44.13,8.57 | IC2.8 v45.4,8.57 | IC3.8 v32.7,8.57 | v33.34,14.92 33.24,14.92 32.7,15.46 IC3.9 | IC5.7 v56.83,8.57 | IC5.8 v58.1,8.57 | IC5.6 v55.56,8.57
  Top 0.508: C5.2 v47.31,14.92 | C1.2 v34.61,14.92 | C2.2 v21.91,14.92
  pour Bottom: 0,41.59 100.01,41.59 100.01,0 0,0
GND1  (via drill 0.33)  (32 unrouted)
  Top 0.152: IC1.6 v30.8,66.04 | IC6.6 v17.14,97.47 | IC9.6 v17.14,57.78 | IC11.6 v40.01,57.78 | IC12.6 v62.87,57.78 | IC13.6 v85.72,57.78 | IC10.6 v85.72,97.47 | IC8.6 v62.87,97.47 | IC7.6 v40.01,97.47
  Top 0.254: IC4.8 v46.35,69.22 | IC4.9 v46.35,72.39 | IC1.8 v33.34,69.53 | IC1.7 v32.07,69.53
  Top 0.508: IC6.7 IC6.8 19.68,91.44 POTS0.10 POTS0.9 | C4.2 v8.89,103.82 | IC7.7 IC7.8 42.55,91.44 POTS1.10 POTS1.9 | C6.2 v29.21,102.23 | IC8.7 IC8.8 65.41,91.44 POTS2.10 POTS2.9 | C8.2 v52.07,102.23 | IC10.7 IC10.8 88.27,91.44 POTS3.10 POTS3.9 | C10.2 v74.93,102.23 | IC9.7 IC9.8 19.68,51.75 POTS4.10 POTS4.9 | C3.2 v6.35,62.55 | IC11.7 IC11.8 42.55,51.75 POTS5.10 POTS5.9 | C7.2 v28.89,62.55 | IC12.7 IC12.8 65.41,51.75 POTS6.10 POTS6.9 | C11.2 v52.07,62.55 | IC13.7 IC13.8 88.27,51.75 POTS7.10 POTS7.9 | C14.2 v74.93,62.55 | C12.2 v35.56,71.44 | C9.2 v22.54,71.12
  pour Bottom: 0,104.78 100.01,104.78 100.01,44.77 0,44.77
N$9
  Top 0.127: ROW0.1 4.45,37.78 7.62,37.78 8.26,37.15 D9.1
N$10
  Top 0.127: ROW0.2 7.3,36.51 8.26,35.56 D10.1
N$11
  Top 0.127: ROW0.3 4.45,35.24 6.99,35.24 8.26,33.97 D11.1
N$12
  Top 0.127: ROW0.4 6.67,33.97 8.26,32.38 D12.1
N$13
  Top 0.127: ROW0.5 4.45,32.7 6.35,32.7 8.26,30.8 D13.1
N$14
  Top 0.127: ROW0.6 6.03,31.43 8.26,29.21 D14.1
N$15
  Top 0.127: ROW0.7 4.45,30.16 6.35,30.16 8.89,27.62 D15.1
N$16
  Top 0.127: ROW0.8 8.57,26.04 D16.1
N$17
  Top 0.127: ROW2.1 28.57,37.78 31.75,37.78 32.38,37.15 D17.1
N$18
  Top 0.127: ROW2.2 31.43,36.51 32.38,35.56 D18.1
N$19
  Top 0.127: ROW2.3 28.57,35.24 31.11,35.24 32.38,33.97 D19.1
N$20
  Top 0.127: ROW2.4 30.8,33.97 32.38,32.38 D20.1
N$21
  Top 0.127: ROW2.5 28.57,32.7 30.48,32.7 32.38,30.8 D21.1
N$22
  Top 0.127: ROW2.6 30.16,31.43 32.38,29.21 D22.1
N$23
  Top 0.127: ROW2.7 28.57,30.16 30.16,30.16 32.7,27.62 D23.1
N$24
  Top 0.127: ROW2.8 32.7,26.04 D24.1
N$25
  Top 0.127: ROW1.1 16.51,37.78 19.68,37.78 20.32,37.15 D25.1
N$26
  Top 0.127: ROW1.2 19.37,36.51 20.32,35.56 D26.1
N$27
  Top 0.127: ROW1.3 16.51,35.24 19.05,35.24 20.32,33.97 D27.1
N$28
  Top 0.127: ROW1.4 18.73,33.97 20.32,32.38 D28.1
N$29
  Top 0.127: ROW1.5 16.51,32.7 18.41,32.7 20.32,30.8 D29.1
N$30
  Top 0.127: ROW1.6 18.1,31.43 20.32,29.21 D30.1
N$31
  Top 0.127: ROW1.7 16.51,30.16 18.41,30.16 20.95,27.62 D31.1
N$32
  Top 0.127: ROW1.8 20.64,26.04 D32.1
N$33
  Top 0.127: ROW4.1 52.7,37.78 55.88,37.78 56.52,37.15 D33.1
N$34
  Top 0.127: ROW4.2 55.56,36.51 56.52,35.56 D34.1
N$35
  Top 0.127: ROW4.3 52.7,35.24 55.24,35.24 56.52,33.97 D35.1
N$36
  Top 0.127: ROW4.4 54.93,33.97 56.52,32.38 D36.1
N$37
  Top 0.127: ROW4.5 52.7,32.7 54.61,32.7 56.52,30.8 D37.1
N$38
  Top 0.127: ROW4.6 54.29,31.43 56.52,29.21 D38.1
N$39
  Top 0.127: ROW4.7 52.7,30.16 54.61,30.16 57.15,27.62 D39.1
N$40
  Top 0.127: ROW4.8 56.83,26.04 D40.1
N$41
  Top 0.127: ROW3.1 40.64,37.78 43.81,37.78 44.45,37.15 D41.1
N$42
  Top 0.127: ROW3.2 43.5,36.51 44.45,35.56 D42.1
N$43
  Top 0.127: ROW3.3 40.64,35.24 43.18,35.24 44.45,33.97 D43.1
N$44
  Top 0.127: ROW3.4 42.86,33.97 44.45,32.38 D44.1
N$45
  Top 0.127: ROW3.5 40.64,32.7 42.55,32.7 44.45,30.8 D45.1
N$46
  Top 0.127: ROW3.6 42.23,31.43 44.45,29.21 D46.1
N$47
  Top 0.127: ROW3.7 40.64,30.16 42.55,30.16 45.09,27.62 D47.1
N$48
  Top 0.127: ROW3.8 44.77,26.04 D48.1
N$57
  Top 0.127: ROW5.1 64.77,37.78 67.94,37.78 68.58,37.15 D57.1
N$58
  Top 0.127: ROW5.2 67.63,36.51 68.58,35.56 D58.1
N$59
  Top 0.127: ROW5.3 64.77,35.24 67.31,35.24 68.58,33.97 D59.1
N$60
  Top 0.127: ROW5.4 66.99,33.97 68.58,32.38 D60.1
N$61
  Top 0.127: ROW5.5 64.77,32.7 66.67,32.7 68.58,30.8 D61.1
N$62
  Top 0.127: ROW5.6 66.36,31.43 68.58,29.21 D62.1
N$63
  Top 0.127: ROW5.7 64.77,30.16 66.67,30.16 69.22,27.62 D63.1
N$64
  Top 0.127: ROW5.8 68.9,26.04 D64.1
N$73
  Top 0.127: ROW6.1 76.83,37.78 80.01,37.78 80.64,37.15 D73.1
N$74
  Top 0.127: ROW6.2 79.69,36.51 80.64,35.56 D74.1
N$75
  Top 0.127: ROW6.3 76.83,35.24 79.38,35.24 80.64,33.97 D75.1
N$76
  Top 0.127: ROW6.4 79.06,33.97 80.64,32.38 D76.1
N$77
  Top 0.127: ROW6.5 76.83,32.7 78.74,32.7 80.64,30.8 D77.1
N$78
  Top 0.127: ROW6.6 78.42,31.43 80.64,29.21 D78.1
N$79
  Top 0.127: ROW6.7 76.83,30.16 78.74,30.16 81.28,27.62 D79.1
N$80
  Top 0.127: ROW6.8 80.96,26.04 D80.1
N$89
  Top 0.127: ROW7.1 88.9,37.78 92.08,37.78 92.71,37.15 D89.1
N$90
  Top 0.127: ROW7.2 91.76,36.51 92.71,35.56 D90.1
N$91
  Top 0.127: ROW7.3 88.9,35.24 91.44,35.24 92.71,33.97 D91.1
N$92
  Top 0.127: ROW7.4 91.12,33.97 92.71,32.38 D92.1
N$93
  Top 0.127: ROW7.5 88.9,32.7 90.81,32.7 92.71,30.8 D93.1
N$94
  Top 0.127: ROW7.6 90.49,31.43 92.71,29.21 D94.1
N$95
  Top 0.127: ROW7.7 88.9,30.16 90.49,30.16 93.03,27.62 D95.1
N$96
  Top 0.127: ROW7.8 90.17,28.57 92.71,26.04 D96.1
POT0  (via drill 0.33)
  Top 0.254: v14.61,103.82 IC6.13 | POTS0.3 11.43,89.53 11.43,93.34 11.75,93.66 v13.97,93.66
  Bottom 0.254: v13.97,93.66 13.97,103.19 v14.61,103.82
POT1  (via drill 0.33)
  Top 0.254: IC6.14 v13.34,103.82 | POTS0.4 v12.7,92.39
  Bottom 0.254: v12.7,92.39 12.7,103.19 v13.34,103.82
POT2  (via drill 0.33)
  Top 0.254: IC6.15 v12.06,103.82 | POTS0.5 13.97,89.53 13.97,92.39 13.34,93.03 v12.06,93.03
  Bottom 0.254: v12.06,103.82 11.43,103.19 11.43,93.66 v12.06,93.03
POT3  (via drill 0.33)
  Top 0.254: v15.88,103.82 IC6.12 | v15.24,93.03 POTS0.6
  Bottom 0.254: v15.24,93.03 15.24,103.19 v15.88,103.82
POT4
  Top 0.254: IC6.1 10.79,94.61 11.11,94.3 15.24,94.3 16.51,93.03 16.51,89.53 POTS0.7
POT5
  Top 0.254: POTS0.8 17.78,92.81 15.88,94.72 IC6.5
POT6  (via drill 0.33)
  Top 0.254: v37.47,103.82 IC7.13 | POTS1.3 34.29,89.53 34.29,93.34 34.61,93.66 v36.83,93.66
  Bottom 0.254: v36.83,93.66 36.83,103.19 v37.47,103.82
POT7  (via drill 0.33)
  Top 0.254: IC7.14 v36.2,103.82 | POTS1.4 v35.56,92.39
  Bottom 0.254: v35.56,92.39 35.56,103.19 v36.2,103.82
POT8  (via drill 0.33)
  Top 0.254: IC7.15 v34.92,103.82 | POTS1.5 36.83,89.53 36.83,92.39 36.2,93.03 v34.92,93.03
  Bottom 0.254: v34.92,103.82 34.29,103.19 34.29,93.66 v34.92,93.03
POT9  (via drill 0.33)
  Top 0.254: v38.73,103.82 IC7.12 | v38.1,93.03 POTS1.6
  Bottom 0.254: v38.1,93.03 38.1,103.19 v38.73,103.82
POT10
  Top 0.254: IC7.1 33.66,94.61 33.97,94.3 38.1,94.3 39.37,93.03 39.37,89.53 POTS1.7
POT11
  Top 0.254: POTS1.8 40.64,92.81 38.73,94.72 IC7.5
POT12  (via drill 0.33)
  Top 0.254: v60.33,103.82 IC8.13 | POTS2.3 57.15,89.53 57.15,93.34 57.47,93.66 v59.69,93.66
  Bottom 0.254: v59.69,93.66 59.69,103.19 v60.33,103.82
POT13  (via drill 0.33)
  Top 0.254: IC8.14 v59.05,103.82 | POTS2.4 v58.42,92.39
  Bottom 0.254: v58.42,92.39 58.42,103.19 v59.05,103.82
POT14  (via drill 0.33)
  Top 0.254: IC8.15 v57.78,103.82 | POTS2.5 59.69,89.53 59.69,92.39 59.05,93.03 v57.78,93.03
  Bottom 0.254: v57.78,103.82 57.15,103.19 57.15,93.66 v57.78,93.03
POT15  (via drill 0.33)
  Top 0.254: v61.59,103.82 IC8.12 | v60.96,93.03 POTS2.6
  Bottom 0.254: v60.96,93.03 60.96,103.19 v61.59,103.82
POT16
  Top 0.254: IC8.1 56.52,94.61 56.83,94.3 60.96,94.3 62.23,93.03 62.23,89.53 POTS2.7
POT17
  Top 0.254: POTS2.8 63.5,92.81 61.59,94.72 IC8.5
POT18  (via drill 0.33)
  Top 0.254: v83.19,103.82 IC10.13 | POTS3.3 80.01,89.53 80.01,93.34 80.33,93.66 v82.55,93.66
  Bottom 0.254: v82.55,93.66 82.55,103.19 v83.19,103.82
POT19  (via drill 0.33)
  Top 0.254: IC10.14 v81.92,103.82 | POTS3.4 v81.28,92.39
  Bottom 0.254: v81.28,92.39 81.28,103.19 v81.92,103.82
POT20  (via drill 0.33)
  Top 0.254: IC10.15 v80.64,103.82 | POTS3.5 82.55,89.53 82.55,92.39 81.92,93.03 v80.64,93.03
  Bottom 0.254: v80.64,103.82 80.01,103.19 80.01,93.66 v80.64,93.03
POT21  (via drill 0.33)
  Top 0.254: v84.45,103.82 IC10.12 | v83.82,93.03 POTS3.6
  Bottom 0.254: v83.82,93.03 83.82,103.19 v84.45,103.82
POT22
  Top 0.254: IC10.1 79.38,94.61 79.69,94.3 83.82,94.3 85.09,93.03 85.09,89.53 POTS3.7
POT23
  Top 0.254: POTS3.8 86.36,92.81 84.45,94.72 IC10.5
POT24  (via drill 0.33)
  Top 0.254: v14.61,64.14 IC9.13 | POTS4.3 11.43,49.85 11.43,53.66 11.75,53.98 v13.97,53.98
  Bottom 0.254: v13.97,53.98 13.97,63.5 v14.61,64.14
POT25  (via drill 0.33)
  Top 0.254: IC9.14 v13.34,64.14 | POTS4.4 v12.7,52.7
  Bottom 0.254: v12.7,52.7 12.7,63.5 v13.34,64.14
POT26  (via drill 0.33)
  Top 0.254: IC9.15 v12.06,64.14 | POTS4.5 13.97,49.85 13.97,52.7 13.34,53.34 v12.06,53.34
  Bottom 0.254: v12.06,64.14 11.43,63.5 11.43,53.98 v12.06,53.34
POT27  (via drill 0.33)
  Top 0.254: v15.88,64.14 IC9.12 | v15.24,53.34 POTS4.6
  Bottom 0.254: v15.24,53.34 15.24,63.5 v15.88,64.14
POT28
  Top 0.254: IC9.1 10.79,54.93 11.11,54.61 15.24,54.61 16.51,53.34 16.51,49.85 POTS4.7
POT29
  Top 0.254: POTS4.8 17.78,53.12 15.88,55.03 IC9.5
POT30  (via drill 0.33)
  Top 0.254: v37.47,64.14 IC11.13 | POTS5.3 34.29,49.85 34.29,53.66 34.61,53.98 v36.83,53.98
  Bottom 0.254: v36.83,53.98 36.83,63.5 v37.47,64.14
POT31  (via drill 0.33)
  Top 0.254: IC11.14 v36.2,64.14 | POTS5.4 v35.56,52.7
  Bottom 0.254: v35.56,52.7 35.56,63.5 v36.2,64.14
POT32  (via drill 0.33)
  Top 0.254: IC11.15 v34.92,64.14 | POTS5.5 36.83,49.85 36.83,52.7 36.2,53.34 v34.92,53.34
  Bottom 0.254: v34.92,64.14 34.29,63.5 34.29,53.98 v34.92,53.34
POT33  (via drill 0.33)
  Top 0.254: v38.73,64.14 IC11.12 | v38.1,53.34 POTS5.6
  Bottom 0.254: v38.1,53.34 38.1,63.5 v38.73,64.14
POT34
  Top 0.254: IC11.1 33.66,54.93 33.97,54.61 38.1,54.61 39.37,53.34 39.37,49.85 POTS5.7
POT35
  Top 0.254: POTS5.8 40.64,53.12 38.73,55.03 IC11.5
POT36  (via drill 0.33)
  Top 0.254: v60.33,64.14 IC12.13 | POTS6.3 57.15,49.85 57.15,53.66 57.47,53.98 v59.69,53.98
  Bottom 0.254: v59.69,53.98 59.69,63.5 v60.33,64.14
POT37  (via drill 0.33)
  Top 0.254: IC12.14 v59.05,64.14 | POTS6.4 v58.42,52.7
  Bottom 0.254: v58.42,52.7 58.42,63.5 v59.05,64.14
POT38  (via drill 0.33)
  Top 0.254: IC12.15 v57.78,64.14 | POTS6.5 59.69,49.85 59.69,52.7 59.05,53.34 v57.78,53.34
  Bottom 0.254: v57.78,64.14 57.15,63.5 57.15,53.98 v57.78,53.34
POT39  (via drill 0.33)
  Top 0.254: v61.59,64.14 IC12.12 | v60.96,53.34 POTS6.6
  Bottom 0.254: v60.96,53.34 60.96,63.5 v61.59,64.14
POT40
  Top 0.254: IC12.1 56.52,54.93 56.83,54.61 60.96,54.61 62.23,53.34 62.23,49.85 POTS6.7
POT41
  Top 0.254: POTS6.8 63.5,53.12 61.59,55.03 IC12.5
POT42  (via drill 0.33)
  Top 0.254: v83.19,64.14 IC13.13 | POTS7.3 80.01,49.85 80.01,53.66 80.33,53.98 v82.55,53.98
  Bottom 0.254: v82.55,53.98 82.55,63.5 v83.19,64.14
POT43  (via drill 0.33)
  Top 0.254: IC13.14 v81.92,64.14 | POTS7.4 v81.28,52.7
  Bottom 0.254: v81.28,52.7 81.28,63.5 v81.92,64.14
POT44  (via drill 0.33)
  Top 0.254: IC13.15 v80.64,64.14 | POTS7.5 82.55,49.85 82.55,52.7 81.92,53.34 v80.64,53.34
  Bottom 0.254: v80.64,64.14 80.01,63.5 80.01,53.98 v80.64,53.34
POT45  (via drill 0.33)
  Top 0.254: v84.45,64.14 IC13.12 | v83.82,53.34 POTS7.6
  Bottom 0.254: v83.82,53.34 83.82,63.5 v84.45,64.14
POT46
  Top 0.254: IC13.1 79.38,54.93 79.69,54.61 83.82,54.61 85.09,53.34 85.09,49.85 POTS7.7
POT47
  Top 0.254: POTS7.8 86.36,53.12 84.45,55.03 IC13.5
POT_A  (via drill 0.33)
  Top 0.152: v17.14,100.65 18.1,99.69 v40.32,99.69 40.64,99.69 40.96,99.38 41.59,99.38 41.91,99.69 v63.18,99.69 63.5,99.69 63.82,99.38 64.45,99.38 64.77,99.69 v86.04,99.69 86.36,99.69 86.68,99.38 93.03,99.38 v93.34,99.69 | IC6.11 v17.14,103.82 | IC7.11 v40.01,103.82 | IC8.11 v62.87,103.82 | IC10.11 v85.72,103.82 | v17.14,60.96 17.78,60.33 40.01,60.33 v40.32,60.01 40.64,59.69 41.59,59.69 41.91,60.01 v63.18,60.01 63.5,60.01 63.82,59.69 64.45,59.69 64.77,60.01 v86.04,60.01 86.36,60.01 86.68,59.69 87.31,59.69 87.63,60.01 91.44,60.01 93.66,62.23 93.66,97.47 v93.34,97.79 | IC9.11 v17.14,64.14 | IC11.11 v40.01,64.14 | IC12.11 v62.87,64.14 | IC13.11 v85.72,64.14 | v40.01,66.04 IC4.3
  Bottom 0.152: v17.14,103.82 v17.14,100.65 | v40.01,103.82 40.32,103.5 v40.32,99.69 | v62.87,103.82 63.18,103.5 v63.18,99.69 | v85.72,103.82 86.04,103.5 v86.04,99.69 | v17.14,64.14 v17.14,60.96 | v40.32,60.01 40.32,63.82 v40.01,64.14 v40.01,66.04 | v62.87,64.14 63.18,63.82 v63.18,60.01 | v85.72,64.14 86.04,63.82 v86.04,60.01 | v93.34,99.69 v93.34,97.79
POT_B  (via drill 0.33, 0.35)
  Top 0.152: v18.41,103.82 IC6.10 | v41.27,103.82 IC7.10 | v64.14,103.82 IC8.10 | v87,103.82 IC10.10 | v18.41,64.14 IC9.10 | v41.27,64.14 IC11.10 | v64.14,64.14 IC12.10 | v87,64.14 IC13.10 | v18.41,100.65 19.05,100.01 39.69,100.01 40.01,100.33 40.96,100.33 v41.27,100.01 62.55,100.01 62.87,100.33 63.82,100.33 v64.14,100.01 85.41,100.01 85.72,100.33 86.68,100.33 v87,100.01 87.31,99.69 92.39,99.69 v92.71,100.01 | v18.41,60.96 18.73,60.64 40.96,60.64 v41.27,60.33 62.55,60.33 62.87,60.64 63.82,60.64 v64.14,60.33 85.41,60.33 85.72,60.64 86.68,60.64 v87,60.33 91.12,60.33 93.34,62.55 93.34,97.16 v92.71,97.79 | IC4.4 v41.27,66.04
  Bottom 0.152: v18.41,100.65 v18.41,103.82 | v41.27,100.01 v41.27,103.82 | v64.14,100.01 v64.14,103.82 | v87,100.01 v87,103.82 | v18.41,60.96 v18.41,64.14 | v41.27,60.33 v41.27,64.14 v41.27,66.04 | v64.14,60.33 v64.14,64.14 | v87,60.33 v87,64.14 | v92.71,100.01 v92.71,97.79
POT_C  (via drill 0.33)
  Top 0.152: IC6.9 19.68,100.65 20,100.33 39.37,100.33 39.69,100.65 41.59,100.65 41.91,100.33 42.55,100.33 | IC7.9 42.55,100.33 | 65.41,100.33 64.77,100.33 64.45,100.65 62.55,100.65 62.23,100.33 42.55,100.33 | IC8.9 65.41,100.33 | 88.27,100.01 87.95,100.01 87.31,100.65 85.41,100.65 85.09,100.33 65.41,100.33 | IC10.9 88.27,100.01 | IC9.9 19.68,61.28 20,60.96 41.59,60.96 41.91,60.64 42.55,60.64 | 42.55,60.64 IC11.9 v42.55,64.14 | 65.41,60.64 64.77,60.64 64.45,60.96 62.55,60.96 62.23,60.64 42.55,60.64 | IC12.9 65.41,60.64 | 88.27,60.64 87.63,60.64 87.31,60.96 85.41,60.96 85.09,60.64 65.41,60.64 | 88.27,60.64 90.81,60.64 93.03,62.87 93.03,96.84 v92.08,97.79 | IC13.9 88.27,60.64 | v92.08,100.33 91.76,100.01 88.27,100.01 | IC4.5 v42.55,66.04
  Bottom 0.152: v92.08,100.33 v92.08,97.79 | v42.55,66.04 v42.55,64.14
POT_VAL_CHAIN_1
  Top 0.254: CHAIN1.3 83.82,76.83 80.01,80.64 17.46,80.64 13.65,76.83 DATA1.4
POT_VAL_CHAIN_2
  Top 0.254: DATA1.5 9.53,75.56 13.65,75.56 18.1,80.01 79.69,80.01 84.14,75.56 89.53,75.56 CHAIN1.4
POT_VAL_CHAIN_3
  Top 0.254: DATA1.6 13.65,74.3 18.73,79.38 79.38,79.38 84.45,74.3 CHAIN1.5
POT_VAL_CHAIN_4
  Top 0.254: DATA1.7 9.53,73.03 13.65,73.03 19.37,78.74 79.06,78.74 84.77,73.03 89.53,73.03 CHAIN1.6
POT_VAL_CHAIN_5
  Top 0.254: DATA1.8 13.65,71.75 20,78.11 78.74,78.11 85.09,71.75 CHAIN1.7
POT_VALUE  (via drill 0.33)
  Top 0.254: CHAIN1.8 89.53,70.48 85.41,70.48 78.42,77.47 v20.95,77.47 | IC1.3 26.99,69.53 26.67,69.85 21.27,69.85 20.95,70.17 v20.95,75.56
  Bottom 0.254: v20.95,75.56 v20.95,77.47 20.32,78.11 9.53,78.11 DATA1.3
RESET  (via drill 0.33)
  Top 0.127: CHAIN.2 95.57,13.97 93.66,13.97 88.58,8.89 88.58,6.03 87.95,5.4 v25.08,5.4 11.75,5.4 10.79,6.35 10.79,10.48 6.03,15.24 DATA.2 | IC3.15 v25.08,14.92 | IC3.7 31.43,8.89 31.11,8.57 v25.08,8.57 v25.08,6.67
  Bottom 0.127: v25.08,14.92 v25.08,8.57 | v25.08,6.67 v25.08,5.4
RESET1  (via drill 0.33)
  Top 0.152: DATA1.2 14.29,82.87 v38.73,82.87 82.87,82.87 87.63,78.11 89.53,78.11 CHAIN1.2 | IC4.15 v38.73,75.56 46.99,75.56 47.31,75.25 47.31,66.36 46.99,66.04 45.4,66.04 45.09,66.36 IC4.7
  Bottom 0.152: v38.73,75.56 v38.73,82.87
ROW0  (via drill 0.33)
  Top 0.127: ROW0.9 ROW0.10 5.71,26.04 12.06,19.68 v40.32,19.68 | IC2.13 v40.32,18.1
  Bottom 0.127: v40.32,18.1 v40.32,19.68
ROW1  (via drill 0.33)
  Top 0.127: ROW1.9 ROW1.10 | IC2.14 v39.05,18.1 | v39.05,21.27 18.41,21.27 v17.78,21.91
  Bottom 0.127: v39.05,18.1 v39.05,21.27 | v17.78,21.91 ROW1.10
ROW2  (via drill 0.33)
  Top 0.127: ROW2.9 ROW2.10 | IC2.15 v37.78,18.1
  Bottom 0.127: v37.78,18.1 37.78,18.41 ROW2.10
ROW3  (via drill 0.33)
  Top 0.127: ROW3.9 ROW3.10 | IC2.12 v41.59,18.1
  Bottom 0.127: ROW3.10 41.59,26.04 v41.59,18.1
ROW4  (via drill 0.33)
  Top 0.127: ROW4.9 ROW4.10 | IC2.1 v36.51,11.75 | v42.55,19.68 v50.16,19.68
  Bottom 0.127: v36.51,11.75 42.55,17.78 v42.55,19.68 | v50.16,19.68 50.16,25.08 ROW4.9
ROW5  (via drill 0.33)
  Top 0.127: IC2.5 41.59,8.67 42.33,7.94 62.87,7.94 63.5,8.57 v63.5,11.43 | ROW5.9 ROW5.10 | v63.5,17.14 v63.5,20.64
  Bottom 0.127: v63.5,11.43 v63.5,17.14 | v63.5,20.64 ROW5.9
ROW6  (via drill 0.33)
  Top 0.127: ROW6.9 ROW6.10 | IC2.2 37.78,8.89 39.37,7.3 74.93,7.3 75.88,8.26 v75.88,11.43 | v75.88,21.59 v75.88,14.61
  Bottom 0.127: v75.88,14.61 v75.88,11.43 | ROW6.9 75.88,26.04 v75.88,21.59
ROW7  (via drill 0.33)
  Top 0.127: ROW7.9 ROW7.10 | IC2.4 v40.32,7.94 | v40.32,6.67 75.29,6.67 87.63,19.01 v87.63,21.59
  Bottom 0.127: v40.32,7.94 v40.32,6.67 | v87.63,21.59 ROW7.9
ROW8  (via drill 0.33)
  Top 0.254: IC6.3 13.34,97.16 13.02,97.47 8.57,97.47 7.94,96.84 7.94,87.63 9.21,86.36 v28.26,86.36 | IC1.13 v28.26,75.56
  Bottom 0.254: v28.26,75.56 v28.26,86.36
ROW9  (via drill 0.33)
  Top 0.254: IC7.3 36.2,97.16 35.88,97.47 31.43,97.47 30.8,96.84 30.8,87.63 28.89,85.72 v26.99,85.72 | v26.99,75.56 IC1.14
  Bottom 0.254: v26.99,85.72 v26.99,75.56
ROW10  (via drill 0.33)
  Top 0.254: IC8.3 59.05,97.16 58.74,97.47 54.29,97.47 52.39,95.57 52.39,87.95 50.16,85.72 29.84,85.72 29.21,85.09 v25.72,85.09 | v25.72,75.56 IC1.15
  Bottom 0.254: v25.72,85.09 v25.72,75.56
ROW11  (via drill 0.33)
  Top 0.254: IC10.3 81.92,97.16 81.6,97.47 76.52,97.47 73.98,94.93 73.98,87.31 71.75,85.09 30.16,85.09 v29.53,84.45 | v29.53,75.56 IC1.12
  Bottom 0.254: v29.53,84.45 v29.53,75.56
ROW12  (via drill 0.33)
  Top 0.254: IC9.3 13.34,57.47 13.02,57.78 v7.94,57.78 | v7.94,64.14 8.89,65.09 23.5,65.09 24.45,66.04 IC1.1
  Bottom 0.254: v7.94,57.78 v7.94,64.14
ROW13  (via drill 0.33)
  Top 0.254: IC11.3 36.2,57.47 35.88,57.78 v29.53,57.78 | IC1.5 v29.53,66.04
  Bottom 0.254: v29.53,66.04 v29.53,57.78
ROW14  (via drill 0.33)
  Top 0.254: IC12.3 59.05,57.47 58.74,57.78 v53.66,57.78 | v53.66,64.14 53.02,64.77 26.99,64.77 25.72,66.04 IC1.2
  Bottom 0.254: v53.66,57.78 v53.66,64.14
ROW15  (via drill 0.33)
  Top 0.254: IC13.3 81.92,57.47 81.6,57.78 v76.52,57.78 | v76.52,64.14 75.25,65.41 28.89,65.41 28.26,66.04 IC1.4
  Bottom 0.254: v76.52,57.78 v76.52,64.14
ROW_A  (via drill 0.33)
  Top 0.127: IC3.6 v30.16,11.75
  Top 0.152: IC2.11 42.86,14.92 42.23,14.29 32.38,14.29 v32.07,14.61 31.43,15.24 IC3.10
  Bottom 0.127: v30.16,11.75 32.07,13.65 v32.07,14.61
ROW_A1
  Top 0.152: IC4.6 43.81,70.17 | IC1.11 30.8,72.07 32.7,70.17 43.81,70.17 | 43.81,70.17 45.09,71.44 IC4.10
ROW_B
  Top 0.152: IC2.10 44.13,14.92 43.18,13.97 31.43,13.97 30.16,15.24 IC3.11
ROW_B1
  Top 0.152: IC4.11 43.81,72.07 42.23,70.48 33.66,70.48 32.07,72.07 IC1.10
ROW_C
  Top 0.152: IC2.9 45.4,15.24 43.81,13.65 30.48,13.65 28.89,15.24 IC3.12
ROW_C1
  Top 0.152: IC4.12 42.55,72.39 40.96,70.8 34.92,70.8 33.34,72.39 IC1.9

## Text on the board
tNames: +V | 1 | 3 | 5 | G | +V | 1 | 3 | 5 | G | +V | 0 | 2 | 4 | G | +V | 0 | 2 | 4 | G | CLK | RST | CLK | RST | O1 | O2 | O2 | O3 | O3 | O4 | O4 | O5 | 48ch potentiometer / scanner v1.0 | O5 | O6 | O6 | O1 | V+ | GND | +V | 1 | 3 | 5 | G | V+ | GND | +V | 0 | 2 | 4 | G | 4VOB | 4VOB | Pin 1-8 = COL0-7 / Pin 9,10 = ROW | CLK | RST | CLK | RST | VAL | C1 | C1 | C2 | C2 | C3 | C3 | C4 | C4 | C5 | C5 | VAL | +V | GND | +V | GND | 8 x 8 key matrix / scanner v1.0